# Altium PCB OTTO.PcbDoc (part 2 of 2)
Units mil, origin at the board's own origin, x right, y up, seen from the top; angles counter-clockwise.
Board outline 6000 x 4000 mil, 4 copper layers (Top Layer, Signal Layer 1, Signal Layer 2, Bottom Layer), stack 30.634 mil thick; 140 components, 89 nets, 485 pads, 197 vias.
Unrouted connection lines stored in the file: 9.
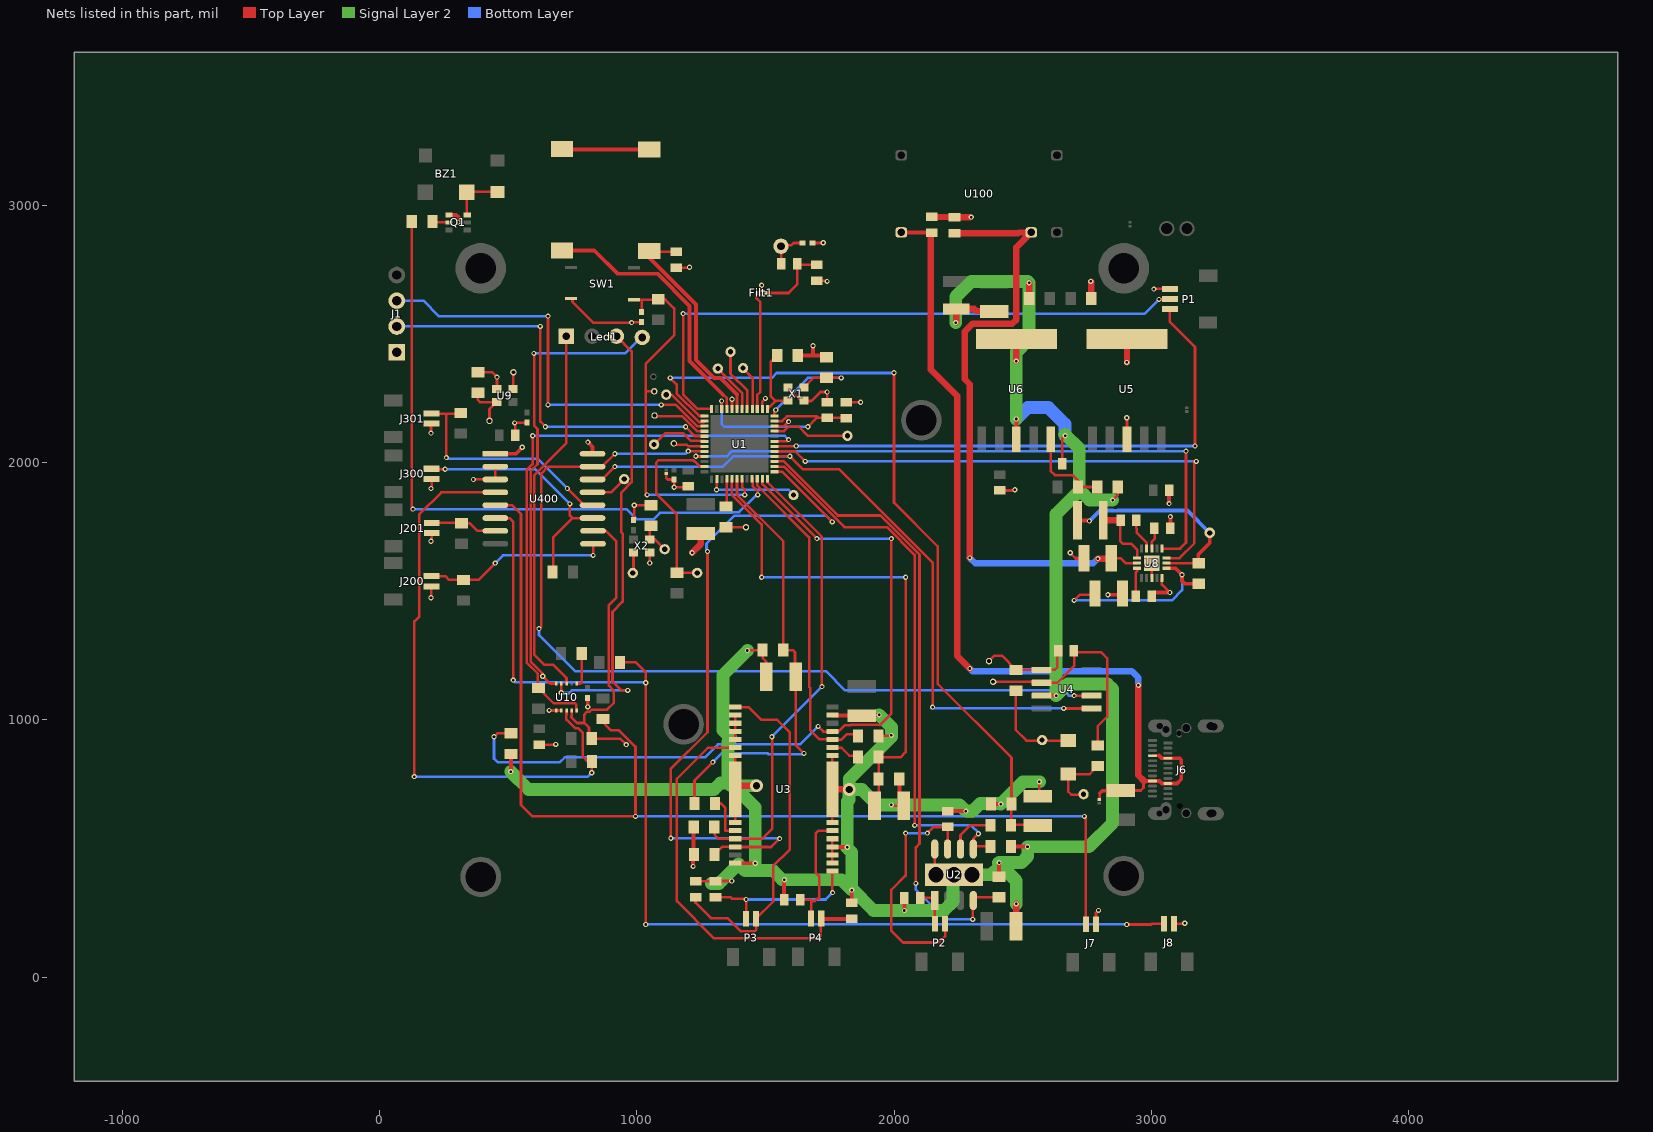
[diagram p4: the nets of this part, all layers, seen from the top]

## Via types
v1: diameter 20, hole 10, Top Layer to Bottom Layer, 190 vias
v2: diameter 40, hole 35, Top Layer to Bottom Layer, 4 vias
v3: diameter 50, hole 28, Top Layer to Bottom Layer, 2 vias
v4: diameter 40, hole 20, Top Layer to Bottom Layer, 1 vias

## Nets (pads, with @x,y where several pads share a name; then routed paths per layer and width w, separated by ;. In a path a pad name is that pad's centre, name@x,y a point inside that pad or via, vN(x,y) a via of type N, cw(c..) or ccw(c..) an arc to the next point about the centre after c; other vN are vias at no path point) (continued)
GND_1: C1.2 C2.2 C4.2 C6.2 C7.1 C14.2 C18.1 C21.1 C22.1 C27.1 C30.1 C31.2 C32.2 C33.1 C34.2 C100.1 C101.1 C104.2 C105.2 C150.2 C151.2 C152.2 C153.2 C154.2 C155.2 C400.1 D1.2 FB1.2 Filt1.2 Filt1.3 J1.1 J7.2 J8.2 J200.2 J201.2 J300.2 J301.2 P1.3 Q1.1 R11.1 R12.1 SW1.1 U1.22 U1.26 U1.32 U5.3 U5.6 U8.6 U8.8 U8.U8 U9.2 U10.6 U10.7 U400.1 U400.2 U400.3 U400.16 X1.2 X1.4 X2.2 | length 3564.4
  Top Layer w10: v1(200,1475) 201.69,1476.69 J200.2@201.69,1519.69 ; v1(200,1695) 202.92,1697.92 J201.2@202.92,1726.58 ; v1(200,1900) 202.2,1902.2 J300.2@202.2,1937.3 ; v1(200,2115) 200,2149.75 J301.2@202.07,2151.82 ; v1(365,1935) U400.3@450.08,1935.02 450,1935.1 U400.2@450.08,1985.02 ; C155.2@382.87,2351.38 383.86,2352.36 437.01,2352.36 v1(456.69,2332.68) 456.69,2289.37 U9.2@453.74,2286.42 ; C400.1@527.37,2106.99 527.37,2152.63 v1(525,2155) 575.32,2155 C154.2@575.79,2154.53 ; C33.1@620.85,903.88 683.88,903.88 v1(685,905) ; v1(659.25,1037.13) 659.61,1036.77 U10.6@686.88,1036.77 ; U10.6@686.25,1036.13 U10.6@686.89,1036.77 ; U10.7@706.88,1036.77 U10.6@686.89,1036.77 ; SW1.1@750,2640 750,2625 830,2545 v1(980,2545) 981.89,2546.89 C14.2@1018.37,2546.89 ; C152.2@987.2,1777.56 990.27,1780.63 990.27,1834.53 C153.2@1055.46,1834.53 ; v1(1050.2,1610.24) 1050.42,1610.46 X2.2@1050.42,1651.05 ; D1.2@1115.35,1958.4 1115.35,1939.65 1120,1935 C1.2@1145,1935 ; C1.2@1145,1935.31 v1(1145,1905) C2.2@1200,1905 ; C18.1@1152.86,2757.88 1202.88,2757.88 v1(1205,2760) ; R12.1@1218.98,475.87 R12.1@1221.17,478.06 ; U1.32@1370.08,2209.35 U1.32@1370.27,2209.17 1370.27,2246.86 v1(1370.08,2247.05) ; Filt1.3@1484.15,2652.47 1484.15,2689.15 v1(1485,2690) ; U1.26@1487.95,2209.17 1487.95,2237.95 v1(1500,2250) ; U1.22@1535.2,2142.24 1572.24,2142.24 v1(1590,2160) ; X1.2@1587.6,2294.29 1587.6,2286.22 1607.28,2266.53 1608.82,2266.53 1614.1,2261.26 1618.66,2261.26 1638.14,2241.78 X1.4@1650.57,2241.78 ; X1.4@1650.59,2241.14 1651.57,2240.16 1679.13,2240.16 1713.98,2275 v1(1740,2275) 1740.91,2274.09 C7.1@1740.91,2236.32 ; C104.2@1682.8,2854.35 1724.35,2854.35 v1(1725,2855) ; C105.2@1700.15,2707.31 1737.69,2707.31 v1(1740,2705) ; C151.2@1732.99,2417.01 C151.2@1740,2410 ; C6.2@1814.65,2236 1869,2236 v1(1870,2235) ; C101.1@2239.53,2955.47 C101.1@2240,2955 ; v1@2294.03,2954.03 2295,2955 v1(2300,2955) ; C22.1@2410.49,1892.2 2467.2,1892.2 v1(2470,1895) ; v1(2685,1650) 2706.43,1628.57 ; v1(2765,2705) v1@2766.5,2703.5 ; J7.2@2785.35,206.43 2785.35,250.35 v1(2795,260) ; v1(2905,2175) 2905.6,2174.4 U5.3@2905.6,2091.02 ; v1(2905,2390) v1@2905.6,2390.6 ; U8.U8@2992.99,1603.57 2992.99,1607.99 U8.U8@2995,1610 ; U8.U8@3001.97,1604.33 3002.09,1604.21 U8.6@3002.09,1552.31 ; v1(3010,2675) 3010.67,2675.67 P1.3@3072.7,2675.67 ; U8.8@3042.32,1550.2 3041.34,1549.21 3041.34,1526.73 v1(3072.5,1495.57) ; J8.2@3088.56,208.13 3128.13,208.13 v1(3130,210)
  Top Layer w15: Q1.1@270.46,2963.67 298.4,2963.67 306.56,2955.51 v1(306.56,2934.51) ; U400.1@450.08,2035.02 530.02,2035.02 v1(555,2060) ; v1(809.25,1051.13) C34.2@809.25,1084.76 ; v1(810,2080) 828.03,2061.97 U400.16@828.03,2035.02 ; v1(1218.98,430.97) R12.1@1218.98,475.87 ; R12.1@1221.17,478.06 R11.1@1221.17,583.31 ; C150.2@1625.63,2417.01 1685,2417.01 ; v1(1685,2455) 1685,2417.01 ; C151.2@1732.99,2417.01 1685,2417.01 ; 2706.43,1628.57 C30.1@2738.35,1628.57 ; v1(2831.5,1486.57) C27.1@2882.65,1486.57 ; C32.2@3002.13,1480.58 3017.12,1495.57 v1(3072.5,1495.57) ; v1(3069.16,1840.91) C21.1@3069.16,1893.6 ; C31.2@3074.5,1744.92 v1(3074.5,1790.57)
  Top Layer w25: v1(1215,1650) 1249.37,1684.37 C4.2@1249.37,1725.14 ; C100.1@2146.27,2955.47 C101.1@2239.53,2955.47 ; C101.1@2235.07,2954.03 v1@2294.03,2954.03 ; FB1.2@2766.5,2637.92 v1@2766.5,2703.5 ; v1@2905.6,2390.6 U5.6@2905.6,2480.79
  Bottom Layer w10: v1(3130,210) v1@3135,210
  other v1: 3002.5,1603.57 990.16,1834.65
GND_2: C3.1 C5.1 C8.2 C9.2 C10.1 C11.2 C12.1 C13.2 C15.1 C16.2 C17.1 C20.2 C23.1 C24.1 FB2.2 R1.2 R4.2 R5.1 R6.2 R9.2 R10.2 R14.2 R21.2 U2.8 U2.9 U3.2 U3.3 U3.4 U3.5 U3.7 U3.8 U3.13 U3.16 U3.17 U3.18 U3.19 U3.21 U3.22 U3.27 U3.Tab1 U3.Tab2 U4.3 U6.3 U6.6 | length 12001.7
  Top Layer w10: R10.2@509.94,867.48 R10.2@510.6,868.13 ; v1(510.25,799.13) v1@510.6,799.48 ; C13.2@1228.56,373.39 C10.1@1298.39,373.39 ; C10.1@1308.07,372.05 1306.73,373.39 C10.1@1298.39,373.39 ; v1(1369.09,374.02) 1299.02,374.02 C10.1@1298.39,373.39 ; U3.Tab2@1382.55,739.45 U3.21@1382.55,860.5 ; U3.22@1382.87,601.38 U3.Tab2@1382.87,731.3 1382.87,736.22 1384.33,737.67 U3.Tab2@1384.84,738.19 ; U3.19@1382.87,924.21 U3.18@1382.87,955.71 U3.17@1382.87,987.2 U3.16@1382.87,1018.7 U3.16@1383.86,1019.68 ; U3.27@1387.53,447.83 U3.27@1392.45,442.91 ; v1(1430,1270) 1431.59,1271.59 R14.2@1489.01,1271.59 ; R14.2@1490,1270 1490,1240 1503.72,1226.28 C17.1@1503.72,1167.57 ; v1@1573,378 v1(1574,379) ; U3.5@1760,538.17 1760.5,537.67 1760.5,506.17 U3.2@1760.5,443.18 ; U3.7@1760.5,600.66 1760.5,730.58 U3.8@1760.5,860.5 ; v1@1815.83,506.17 1817,505 v1(1818,505) ; v3(1826,730) v3@1826.58,730.58 ; C11.2@1872.13,1017.98 C11.2@1874,1019.85 ; R9.2@1940,938.35 1988.35,938.35 v1(1990,940) ; v1(1942,1020) 1942.7,1020 v1@1942.85,1019.85 ; v1(1990,670) 1986,666 2021,666 C12.1@2038.09,666 ; U2.8@2158.37,508.34 U2.8@2158.37,498.34 2158.37,426.63 U2.9@2160,425 ; v1(2240,2545) v1@2241.43,2546.42 ; v1@2279,646 v1(2279.5,645.5) ; v1@2413.98,674.02 v1(2415,673) ; v1(2475,2170) v1@2475.6,2169.4 ; v1(2475,2395) v1@2475.6,2395.6 ; v1@2517.65,508.35 v1(2519,507) ; v1(2525,2700) v1@2525.5,2699.5 ; C3.1@2559,704.09 2565,710.09 v1(2565,760) ; C23.1@2654.13,1995.58 2654.13,2094.13 v1(2665,2105) ; v1(2850,1855) 2869.84,1874.84 R21.2@2869.84,1905.55
  Top Layer w15: v1@510.6,799.48 R10.2@510.6,868.13 ; U3.27@1392.45,442.91 v1(1460.63,442.91) ; C15.1@1573,300.35 v1@1573,378 ; U3.4@1760.5,506.17 v1@1815.83,506.17 ; U3.13@1760.5,1017.98 C11.2@1872.13,1017.98 ; C16.2@1835.65,289 v1(1835.65,338.65) ; C11.2@1874,1019.85 v1@1942.85,1019.85 ; C12.1@2021,666 R6.2@2021,769.35 ; v1(2040.34,259.34) C5.1@2040.34,307.98 ; C8.2@2208.65,646 v1@2279,646 ; R1.2@2376.66,674.02 v1@2413.98,674.02 ; R5.1@2408.35,391 v1(2408.35,445.35) ; R4.2@2455,508.35 v1@2517.65,508.35 ; U6.3@2475.6,2091.02 v1@2475.6,2169.4 ; U4.3@2573.45,1094.74 v1(2630.36,1094.74)
  Top Layer w25: U3.Tab2@1382.55,739.45 U3.Tab2@1384.33,737.67 ; U3.Tab2@1383.86,744.09 v3(1465.55,744.09) ; U3.Tab1@1760.5,730.58 1826,730.58 v3@1826.58,730.58 ; v1@2241.43,2546.42 C24.1@2241.43,2598.35 2311.65,2598.35 2320,2590 C20.2@2395,2590 ; C9.2@2474.43,198.63 2475,199.2 v1(2475,285) ; v1@2475.6,2395.6 U6.6@2475.6,2480.79 ; FB2.2@2525.5,2638.23 v1@2525.5,2699.5
  Signal Layer 2 w10: 1290,365 1299.02,374.02 1329.02,374.02 v1(1369.09,374.02) ; 1335,985 1337,987 ; 1395,440 1397.91,442.91 v1(1460.63,442.91) ; v1@1565,380 v1@1570,380 ; v3@1825,730 v3(1826,730) ; v1@1835,345 v1@1835.65,344.35 ; U2.9@2230,395 U2.9@2235,400 ; v1(2279.5,645.5) v1@2280,645 ; v1@2470,2395 v1@2475,2390 ; v1@2520,2705 v1(2525,2700) ; 2715,1900 2720,1895
  Signal Layer 2 w50: v1(510.25,799.13) 579.39,730 1300,730 1325,755 1355.32,755 ; 1290,365 1320,365 1329.02,374.02 1395,440 1420,415 1530,415 v1@1565,380 ; v1(1430,1270) 1335,1175 1335,985 1335,960 1367,928 1355.32,916.32 1355.32,755 ; v1(1460.63,442.91) 1460.63,659.37 1375.91,744.09 ; v3(1465.55,744.09) 1375.91,744.09 ; v1(1574,379) 1796,379 v1@1835,340 ; v1@1815,505 1835.65,484.35 1835.65,344.35 1920.66,259.34 v1(2040.34,259.34) 2194.34,259.34 2230,295 U2.9@2230,395 ; v1(1818,505) 1818,683 1825,690 v3@1825,730 ; v1(1942,1020) 1990,972 v1(1990,940) ; v1@1990,935 1826,771 v3(1826,730) 1875,730 1935,670 v1(1990,670) 2255,670 v1(2279.5,645.5) 2305.5,645.5 2335,675 v1@2415,675 ; v1(2240,2545) 2240,2645 2300,2705 v1@2520,2705 ; U2.9@2303.37,398.34 2378.34,398.34 2410,430 ; v1@2405,445 2475,375 v1(2475,285) ; v1(2408.35,445.35) 2495.35,445.35 2520,470 v1@2520,505 ; v1(2415,673) 2502,760 v1(2565,760) ; v1(2475,2170) v1@2475,2390 ; v1(2475,2395) 2475,2430 2525,2480 v1(2525,2700) ; v1(2519,507) 2757,507 2850,600 2850,1120 2830,1140 2675.62,1140 v1(2630.36,1094.74) 2630.36,1800.36 2720,1890 2720,1895 ; v1@2665,2110 2720,2055 2720,1895 ; v1(2850,1855) 2760,1855 2720,1895 ; 1355.32,755 1366.22,744.09 1375.91,744.09 ; 1355.32,755 1365,755 1375.91,744.09
  Bottom Layer w50: v1(2475,2170) 2520,2215 2600,2215 2665,2150 v1(2665,2105)
NetANT1_1: ANT1.1 C104.1 L3.1 | length 169.5
  Top Layer w10: ANT1.1@1560,2855 1561.72,2853.28 ANT1.1@1561.72,2848.28 ; L3.1@1561.72,2773.16 ANT1.1@1561.72,2848.28 ; C104.1@1643.43,2854.35 1609.35,2854.35 1600,2845 1565,2845 ANT1.1@1561.72,2848.28
NetBZ1_1: BZ1.1 D4.2 Q1.6 | length 220.1
  Top Layer w10: BZ1.1@340,3050 343.08,3053.08 D4.2@459.14,3053.08 ; Q1.6@341.33,2963.67 339.61,2965.39 BZ1.1@339.61,3052.28 BZ1.1@346.92,3059.59
NetC3_2: C3.2 R1.1 R2.2 U1.37 | length 3126
  Top Layer w10: v1(1130,2330) 1155,2305 1155,2270 1155.2,2270 1243.59,2181.61 U1.37@1263.54,2181.61 ; v1(2000,2350) 2000,1845 2170,1675 2170,1140 2456.66,853.34 R1.1@2456.66,674.02 2455,672.36 R2.2@2455,591 2456,592 C3.2@2539.35,592
  Bottom Layer w10: v1(1130,2330) 1525,2330 1544,2349 v1@1999,2349
NetC5_2: C5.2 P2.1 U2.1 | length 156.3
  Top Layer w10: C5.2@2102.34,307.98 2102.7,308.34 2158.37,308.34 2158.66,308.05 P2.1@2158.66,208.37
NetC6_1: C6.1 C7.2 U1.23 U1.34 | length 834.5
  Top Layer w10: U1.34@1330,2220 v1(1330,2240) ; U1.23@1535.2,2161.92 1565.05,2161.92 1583.13,2180 1700,2180 1705,2175 C7.2@1745,2175 ; v1(1665,2140) 1699.32,2174.32 1810.68,2174.32 C6.1@1815,2170
  Bottom Layer w10: v1(1330,2240) 1330,2150 1340,2140 v1(1665,2140)
NetC8_1: C8.1 P2.2 U2.7 | length 952.7
  Top Layer w10: v1(2045,560) 2045,395 1990,340 1990,180 2035,135 2175,135 2200,160 P2.2@2200,220 ; v1(2130,560) 2154,584 C8.1@2208.65,584 ; U2.7@2208.37,508.34 2208.37,583.37 C8.1@2210,585
  Bottom Layer w10: v1(2045,560) v1(2130,560)
NetC10_2: C10.2 P3.1 U3.1 | length 626.3
  Top Layer w10: C10.2@1308.07,312.99 1310.04,311.02 1364.61,311.02 1370.98,304.66 1422.34,304.66 v1(1425,302) 1425,227.71 P3.1@1424.66,227.37 ; U3.1@1760.5,411.68 1760.5,329.5 v1(1761,329)
  Bottom Layer w10: v1(1425,302) 1734,302 v1(1761,329)
NetC12_2: C12.2 R6.1 R8.2 U1.5 | length 1973.3
  Top Layer w10: U1.5@1369.84,1937.51 1369.84,1875.16 1485,1760 v1(1485,1555) ; C12.2@1941,665.65 1941,769.35 R6.1@1940,770.35 1940,855 2025,855 2045,875 v1(2045,1555)
  Bottom Layer w10: v1(1485,1555) v1(2045,1555)
NetC13_1: C13.1 P3.2 U3.15 | length 1379.4
  Top Layer w10: C13.1@1228.35,311.02 1228.35,290.31 1288.65,230 1353,230 1405,178 1458,178 1464.03,184.03 P3.2@1464.03,227.37 1530,293.34 1530,431.64 1595,496.64 1595,951.26 1546.13,1000.13 1484.12,1000.13 1434.06,1050.2 1384.84,1050.2 U3.15@1383.86,1051.18
NetC14_1: "Jump 2.1" C14.1 R7.1 SW1.2 U1.7 | length 1472.6
  Top Layer w10: SW1.2@990,2635 990,2633.66 R7.1@1083.66,2633.66 ; C14.1@1018.37,2586.26 1020,2587.89 1020,2630 ; v1(1040,1875) 1035,1880 1035,2275 ; 1068.01,2277.57 1037.57,2277.57 1035,2275 ; R7.1@1080,2635 1110,2635 1145,2600 1145,2495 1035,2385 1035,2275 ; U1.7@1409.21,1937.51 1409.21,1905.79 1420,1895 v1(1420,1875)
  Bottom Layer w10: v1(1040,1875) v1(1420,1875)
NetC15_2: C15.2 P4.1 U3.6 | length 480.3
  Top Layer w10: C15.2@1635,300.35 1676.32,300.35 1677.66,299 ; P4.1@1677.66,228.37 1677.66,299 ; U3.6@1760.5,569.17 1705.17,569.17 1695,559 1695,407.43 1710,392.43 1710,306.03 1708.42,304.45 1700.21,304.45 1692.01,296.25 1680.42,296.25 1677.66,299
NetC16_1: C16.1 P4.2 U3.20 | length 1564.5
  Top Layer w10: U3.20@1384.84,892 1276,892 1155.51,771.51 1155.51,295.49 1299,152 1706,152 1716,162 1716,227.34 P4.2@1716.34,227
  Top Layer w15: P4.2@1716.34,227 C16.1@1835.65,227
NetC17_2: C17.2 R13.2 R14.1 U1.6 | length 1764.3
  Top Layer w10: R13.2@1224.41,675.2 1224.41,764.41 v1(1296,836) ; U1.6@1389.53,1939.53 U1.6@1389.53,1937.51 1389.53,1875.27 1570,1694.8 R14.1@1570,1271.59 ; R14.1@1569.01,1271.59 R14.1@1570,1271.59 ; R14.1@1570,1270 R14.1@1570,1271.59 ; C17.2@1617.9,1167.57 C17.2@1617.9,1167.1 ; v1(1650,870) 1617.9,902.1 C17.2@1617.9,1167.1 ; R14.1@1570,1271.59 1606.59,1271.59 1615,1263.18 1615,1170 C17.2@1617.9,1167.1
  Bottom Layer w10: v1@1295,835 v1(1296,836) 1330,870 1508.33,870 1511.33,867 1647,867 v1(1650,870)
NetC18_2: C18.2 L2.1 U1.31 | length 920.1
  Top Layer w10: L2.1@1020,2825 L2.1@1040,2825 ; L2.1@1040,2820 1040.12,2819.88 C18.2@1152.86,2819.88 ; L2.1@1045,2825 L2.1@1047.55,2822.45 ; U1.31@1389.53,2209.17 1389.53,2265.47
  Top Layer w15: L2.1@1020,2825 1230,2615 1230,2400 1300,2330 1325,2330 1389.53,2265.47
NetC19_1: C19.1 R16.1 Term5.1 U4.1 | length 367.8
  Top Layer w10: Term5.1@2369.33,1228.74 2390.59,1250 2420,1250 R16.1@2475,1195 ; R16.1@2473.99,1194.11 2474.62,1194.74 U4.1@2573.45,1194.74 2624.74,1194.74 2635,1205 C19.1@2635,1270
NetC19_2: C19.2 R15.1 Term4.1 U4.2 | length 894.2
  Top Layer w10: Term4.1@2385.33,1148.74 2569.45,1148.74 U4.2@2573.45,1144.74 2634.74,1144.74 2700,1210 C19.2@2700,1265 ; C19.2@2700,1270 2705.88,1264.12 2804.62,1264.12 2828.99,1239.75 2828.99,1013.11 2791.97,976.09 R15.1@2791.97,900.77
NetC27_2: C27.2 R20.1 U8.9 | length 745.3
  Top Layer w10: v1(2700,1465) 2721.57,1486.57 C27.2@2776.35,1486.57
  Top Layer w15: U8.9@3060.02,1589.68 3094.39,1589.68 v1(3119.5,1564.57) 3119.5,1540.57 3130.5,1529.57 R20.1@3184.5,1529.57
  Bottom Layer w10: v1(2700,1465) 3080,1465 3120,1505 v1@3120,1565
NetC29_1: C29.1 U8.15 | length 123.4
  Top Layer w10: 2942.5,1746.57 C29.1@2942.5,1776.23 ; 2942.91,1744.09 2942.91,1729.03 2982.4,1689.54 U8.15@2982.4,1666.67
NetC29_2: C29.2 L4.1 U8.1 | length 260.8
  Top Layer w10: L4.1@2813.5,1775.57 L4.1@2814.15,1776.23 ; C29.2@2880,1775.73 2880,1694.07 2888.5,1685.57 2921.5,1685.57 2945.65,1661.42 2945.65,1631.12 U8.1@2946.85,1629.92
  Top Layer w25: L4.1@2814.15,1776.23 C29.2@2880.5,1776.23
  Top Layer w35: C29.2@2880,1775.73 C29.2@2880.5,1776.23
NetC30_2: C30.2 C101.2 U8.2 U100.9 | length 2441.3
  Top Layer w10: 2482.03,2892.03 2485,2895 ; U100.9@2532.87,2895 U100.9@2533.39,2895.53 ; C30.2@2843.65,1627.57 C30.2@2844.65,1628.57 ; C30.2@2846.46,1627.95 2881.89,1627.95 2900.35,1609.49 U8.2@2944.91,1609.49
  Top Layer w25: C101.2@2235.07,2892.03 2482.03,2892.03 ; v1(2295,1630) 2295,2305 2275,2325 2275,2510 2305,2540 2460,2540 2475,2555 2475,2837.13 U100.9@2532.87,2895 ; 2485,2895 U100.9@2532.87,2895 ; U100.9@2535,2895 U100.9@2532.87,2895 ; v1(2792.5,1627.57) C30.2@2843.65,1627.57
  Bottom Layer w25: v1(2295,1630) 2315.43,1609.57 2774.57,1609.57 v1@2790,1625
NetC31_1: C31.1 U8.14 | length 82.1
  Top Layer w10: U8.14@3002.09,1666.67 3002.09,1693.03 3012.8,1703.74 C31.1@3012.8,1744.09 ; C31.1@3012.5,1744.92 C31.1@3012.68,1744.74
NetC32_1: C32.1 U8.3 | length 111.4
  Top Layer w10: C32.1@2940.13,1480.58 2940.13,1573.98 2944.88,1578.74 U8.3@2944.88,1588.58 ; U8.3@2942.91,1589.57 U8.3@2943.9,1588.58
NetC100_2: C100.2 C102.1 D100.2 J6.A4 J6.A9 J6.B4 J6.B9 U100.14 | length 3525.3
  Top Layer w10: U100.14@2028.39,2895.53 U100.14@2028.92,2895 ; C100.2@2142.64,2889.85 C100.2@2146.27,2893.47 ; D100.2@2798.43,690.39 2800,691.97 2800,715 ; C102.1@2881.81,725.79 2959.21,725.79 2970,736.57 2970,760 ; J6.A9@3005.15,861.33 3030.67,861.33
  Top Layer w15: U100.14@2028.92,2895 C100.2@2145,2895 ; 2800,715 2810,725 C102.1@2875,725 ; 2972.1,762.9 J6.A4@3005.15,762.9 3032.1,762.9 3041.94,753.06 J6.B9@3064.4,753.06 3100.06,753.06 3116.5,769.5 3116.5,845.47 3110.49,851.49 J6.B4@3064.4,851.49 3040.51,851.49 3030.67,861.33
  Top Layer w25: C100.2@2142.64,2889.85 2142.64,2362.36 2245,2260 2245,1250 v1(2295,1200) ; v1(2950,1135) 2950,785 2972.1,762.9
  Bottom Layer w25: v1(2295,1200) 2305,1190 2925,1190 2950,1165 v1(2950,1135)
NetC105_1: C105.1 Filt1.4 L3.2 | length 294.7
  Top Layer w10: Filt1.4@1505,2660 1590,2660 1623.72,2693.72 L3.2@1623.72,2773.16 1626.88,2770 C105.1@1705,2770
NetC150_1: C150.1 U1.25 X1.3 | length 286.1
  Top Layer w10: U1.25@1510,2210 1540,2240 ; C150.1@1545.63,2417.01 1520,2391.38 1520,2260 1540,2240 ; X1.3@1587.34,2240.98 1540.98,2240.98 1540,2240
NetC151_1: C151.1 U1.24 X1.1 | length 491.1
  Top Layer w10: U1.24@1535.2,2181.92 1535.2,2200.2 v1(1540,2205) ; X1.1@1650.59,2293.31 1687.91,2330.63 C151.1@1737.99,2330.63 ; C151.1@1739.02,2330.98 1740,2330 v1(1795,2330)
  Bottom Layer w10: v1(1540,2205) 1665,2330 v1(1795,2330)
NetC153_1: "Jump 1x.1" C153.1 X2.3 | length 127.2
  Top Layer w10: X2.3@1050.42,1702.12 1050.42,1748.26 C153.1@1056.1,1753.94 ; X2.3@1051.18,1701.77 1070.49,1701.77 1108.5,1663.76
NetC155_1: "Term 8.1" C155.1 U9.3 | length 188.5
  Top Layer w10: C155.1@381.89,2270.67 381.89,2244.09 390.12,2235.86 U9.3@455.35,2235.86 ; 427.55,2162.95 427.55,2208.06 U9.3@455.35,2235.86 ; U9.3@455.47,2235.86 U9.3@455.35,2235.86 ; U9.3@455.71,2236.22 U9.3@455.35,2235.86
NetFilt1_1: Filt1.1 U1.27 | length 461.9
  Top Layer w10: Filt1.1@1465,2660 1465,2640 1480,2625 1480,2275 1468.27,2263.27 U1.27@1468.27,2209.17
NetJ1_3: J1.3 U1.39 | length 1602.7
  Top Layer w10: v1(655,2225) v1(655,2570) ; v1(1095,2225) 1151.67,2225 1234.43,2142.24 U1.39@1263.54,2142.24
  Bottom Layer w10: J1.3@65,2630 170,2630 230,2570 v1(655,2570) ; v1(655,2225) v1(1095,2225)
NetJ7_1: J7.1 R30.1 U400.5 | length 4334.7
  Top Layer w10: U400.5@450.08,1835.02 514.98,1835.02 550,1800 550,670 595,625 v1(995,625) 995,895.26 930.26,960 900,960 855.24,1004.76 R30.1@855.24,1005.76 ; v1(2740,625) 2745,625 2745.98,624.02 J7.1@2745.98,206.43
  Bottom Layer w10: v1(995,625) 1840,625 1841.5,626.5 2738.5,626.5 v1(2740,625)
NetJ8_1: J8.1 R29.1 U400.6 | length 4323.2
  Top Layer w10: U400.6@450.08,1785.02 504.98,1785.02 520,1770 v1(520,1155) ; R29.1@935,1225 995,1225 1035,1185 v1(1035,1145) v1(1035,205) ; v1(2905,205) 3000,205 3003.13,208.13 J8.1@3049.19,208.13
  Bottom Layer w10: v1(520,1155) 528.87,1146.13 1033.87,1146.13 v1(1035,1145) ; v1(1035,205) 1036,206 2904,206 v1(2905,205)
NetJ200_1: J200.1 R200.1 U400.9 | length 718.9
  Top Layer w10: J200.1@201.69,1559.06 255.94,1559.06 270,1545 385,1545 v1(450,1610) v1(450,1610) ; U400.9@830.08,1685.02 v1(830,1640) 830.16,1640 v1(830,1640)
  Bottom Layer w10: v1(450,1610) 480,1640 v1(830,1640)
NetJ201_1: J201.1 R201.1 U400.7 | length 260
  Top Layer w10: J201.1@202.92,1765.95 319.05,1765.95 320,1765 350,1765 379.98,1735.02 U400.7@450.08,1735.02
NetJ300_1: J300.1 R300.1 U400.11 | length 976.2
  Top Layer w10: J300.1@200,1980 205,1975 v1(255,1975) ; R300.1@675,1575 675,1710 750,1785 740,1795 v1(740,1840) ; 750.02,1785.02 U400.11@828.03,1785.02
  Bottom Layer w10: v1(255,1975) 605,1975 v1(740,1840)
NetJ301_1: J301.1 R301.1 U400.12 | length 929.3
  Top Layer w10: J301.1@202.07,2191.19 260,2191.19 ; v1(260,2020) 260,2191.19 ; R301.1@315,2190 313.81,2191.19 260,2191.19 ; v1(730,1900) 794.98,1835.02 U400.12@828.03,1835.02
  Bottom Layer w10: v1(260,2020) 264,2016 614,2016 v1(730,1900)
"NetJump 1_1": "Jump 1.1" U1.43 | length 123.3
  Top Layer w10: 1145,2075 1150,2070 1195,2070 1201,2064 1263.04,2064 U1.43@1263.54,2063.5
"NetJump 2x_1": "Jump 2x.1" X2.1 | length 79.6
  Top Layer w10: 986.22,1571.85 987.24,1572.87 X2.1@987.24,1651.05
"NetJump 3_1": "Jump 3.1" U1.2 | length 350.3
  Top Layer w10: v1(1310,1895) 1311.21,1896.21 U1.2@1311.21,1936.51
  Bottom Layer w10: v1(1310,1895) 1590,1895 1610,1875
"NetJump 3x_1": "Jump 3x.1" U9.1 | length 64.9
  Top Layer w10: U9.1@518.7,2287.4 520.39,2289.09 520.39,2351.63
"NetJump 5_1": "Jump 5.1" R3.1 | length 77.8
  Top Layer w10: R3.1@1347.37,1749.66 1424.66,1749.66 1425,1750
"NetJump 100_1": "Jump 100.1" U1.42 | length 228.8
  Top Layer w10: 1067.46,2071.29 1110,2113.83 1110,2115 1180,2115 1210,2085 U1.42@1265,2085
"NetJump 101_1": "Jump 101.1" U1.38 | length 194.6
  Top Layer w10: 1115,2265 1135,2265 1242.18,2157.82 1259.44,2157.82 U1.38@1263.54,2161.92
"NetJump 103_1": "Jump 103.1" U1.40 | length 219.4
  Top Layer w10: 1070,2185 1075,2180 1176.87,2180 1234.32,2122.55 U1.40@1263.54,2122.55
"NetJump 104_1": "Jump 104.1" U1.30 | length 202
  Top Layer w10: 1310,2370 1409.27,2270.73 U1.30@1409.27,2209.17
"NetJump 105_1": "Jump 105.1" U1.29 | length 248.4
  Top Layer w10: 1364.46,2431.26 1364.46,2345.54 1430,2280 U1.29@1430,2210
"NetJump 106_1": "Jump 106.1" U1.28 | length 173.2
  Top Layer w10: 1413.24,2367.97 1413.24,2366.76 1450,2330 U1.28@1450,2210
"NetJump 109_1": "Jump 109.1" U1.21 | length 305.5
  Top Layer w10: U1.21@1535.2,2122.92 1572.92,2122.92 1590,2140 1630,2140 1665.2,2104.8 1819.03,2104.8
NetL1_1: L1.1 L2.2 | length 339.1
  Top Layer w10: L1.1@710,3220 L1.1@711.72,3218.28
  Top Layer w15: L1.1@711.72,3218.28 L2.2@1048.37,3218.28
NetL1_2: L1.2 U1.33 | length 1046.8
  Top Layer w10: 1336,2264 1337.87,2264 1350.39,2251.48 1350.39,2209.4 U1.33@1350.16,2209.17
  Top Layer w15: L1.2@709.56,2825.15 834.85,2825.15 925,2735 1080,2735 1205,2610 1205,2395 1336,2264
NetL4_2: L4.2 R20.2 U8.10 | length 830.6
  Top Layer w10: v1@2757.5,1775.57 v1(2759.5,1773.57) ; U8.10@3060.02,1609.36 3184.28,1609.36 R20.2@3182.5,1611.15
  Top Layer w15: L4.2@2713.5,1775.57 v1@2757.5,1775.57 ; R20.2@3182.5,1611.15 3182.5,1643.57 3227.5,1688.57 v4(3227.5,1727.57)
  Bottom Layer w15: v1(2759.5,1773.57) 2800.5,1814.57 2850.02,1814.57 2851.09,1813.5 2868.91,1813.5 2869.98,1814.57 3140.5,1814.57 v4(3227.5,1727.57)
NetLed1_1: Led1.1 U10.3 | length 1474.8
  Top Layer w10: Led1.1@726.14,2492.13 726.14,2075.94 601,1950.8 601,1254 640,1215 675,1215 726.88,1163.12 U10.3@726.88,1141.77
NetLed1_3: Led1.3 U10.4 | length 1776.9
  Top Layer w10: v1@706.25,1105.13 v1(706.25,1106.13) 706.88,1106.76 U10.4@706.88,1141.77 ; Led1.3@921.14,2492.13 980.2,2433.07 980.2,1924.28 940,1884.08 940,1729.67 945,1724.67 945,1460 905.62,1420.62 905.62,1149.38 940,1115 v1(965,1115)
  Bottom Layer w10: v1@705,1105 737.32,1105 747.32,1115 v1(965,1115)
NetLed1_4: Led1.4 U10.5 | length 1802.7
  Top Layer w10: v1(600,2425) 601.83,2423.17 601.83,2143.17 614,2131 614,1994.2 587,1967.2 587,1227.8 634.25,1180.55 v1(634.25,1170.13) 662.61,1141.77 U10.5@686.88,1141.77
  Bottom Layer w10: v1(600,2425) 955,2425 Led1.4@1020,2490
NetP1_1: P1.1 U1.18 | length 2207.1
  Top Layer w10: U1.18@1535.2,2063.5 1608.5,2063.5 v1(1620,2065) ; P1.1@3072.7,2596.93 3072.7,2547.3 3170,2450 v1(3170,2065)
  Bottom Layer w10: v1(1620,2065) v1(3170,2065)
NetP1_2: P1.2 U1.36 | length 2365.3
  Top Layer w10: v1(1180,2580) 1180,2265 1235.83,2209.17 U1.36@1291.1,2209.17 ; v1(3030,2635) 3071.4,2635 P1.2@3072.7,2636.3
  Bottom Layer w10: v1(1180,2580) 2975,2580 v1(3030,2635)
NetQ1_2: Q1.2 R23.1 | length 66.2
  Top Layer w10: R23.1@205.56,2937.17 208.58,2934.14 243.62,2934.14 243.73,2934.25 270.35,2934.25 Q1.2@270.46,2934.14
NetR2_1: R2.1 U2.6 | length 176.7
  Top Layer w10: U2.6@2258.37,508.34 2258.37,552.37 2297,591 R2.1@2375,591
NetR3_2: R3.2 U1.4 | length 106.4
  Top Layer w10: R3.2@1347.37,1829.66 1350,1832.29 U1.4@1350,1935
NetR4_1: R4.1 U1.14 U2.5 | length 2126.2
  Top Layer w10: U1.14@1535.2,1984.76 1534.95,1985 1571.87,1985 1806.87,1750 1971.87,1750 2080,1641.87 v1(2080,590) ; v1(2328,558) 2308.37,538.37 2308.37,508.34 R4.1@2375,508.35
  Bottom Layer w10: v1(2080,590) 2300,590 v1@2330,560
NetR5_2: R5.2 U1.15 U2.4 | length 2476.9
  Top Layer w10: U1.15@1535.2,2004.44 1535.2,2005 1571.67,2005 1781.67,1795 1946.67,1795 2099,1642.67 2099,519 2085,505 v1(2085,365) ; v1(2306,225) 2306,305.97 2311.03,311 R5.2@2408.35,311
  Bottom Layer w10: v1(2085,365) 2085,340 2200,225 v1(2306,225)
NetR8_1: R8.1 U3.9 | length 113.3
  Top Layer w10: U3.9@1760.5,892 1796,892 1827,861 1857.65,861 R8.1@1860,863.35
NetR9_1: R9.1 U1.10 U3.10 | length 1267.2
  Top Layer w10: U1.10@1468.27,1937.51 1468.27,1911.73 1670,1710 1670,1128.5 1675,1123.5 1675,960 1710,925 U3.10@1755,925 ; U3.10@1760.5,923.5 1795.5,923.5 1817.35,945.35 R9.1@1861,945.35
NetR10_1: R10.1 U1.11 U3.11 | length 3088.8
  Top Layer w10: v1(445,935) 458.13,948.13 R10.1@510.6,948.13 ; U1.11@1487.95,1937.51 1487.95,1917.05 v1(1700,1705) ; v1(1705,975) 1725,955 1750,955 U3.11@1750,950 ; U3.11@1760.5,954.99 1783.69,954.99 1808.69,980 1831,980 1832,981 1946,981 ; 1945,980 1946,981 ; v1(1990,1705) 1990,1025 1946,981
  Bottom Layer w10: v1(445,935) 445,850 460,835 700,835 720,855 1265,855 1315,905 1635,905 v1(1705,975) ; v1(1700,1705) v1(1990,1705)
NetR11_2: R11.2 U1.12 U3.24 | length 1808.3
  Top Layer w10: R11.2@1302.17,586.61 1303.15,585.63 1303.15,553.15 1317.91,538.39 U3.24@1382.87,538.39 ; U3.24@1383.33,537.67 1486.67,537.67 1526,577 1526,934 v1(1525,935) ; U1.12@1507.64,1937.51 1507.64,1924.23 1719,1712.87 1719,1136 1720,1135 v1(1720,1130)
  Bottom Layer w10: v1(1525,935) v1(1720,1130)
NetR12_2: R12.2 U1.13 U3.25 | length 2759.2
  Top Layer w10: v1(1132.87,540.35) 1131.89,541.34 1131.89,809.15 1275,952.26 v1(1275,1655) ; R12.2@1302.17,477.36 1331.69,506.89 U3.25@1382.87,506.89 ; U3.25@1381.89,507.87 1383.59,506.17 1512.83,506.17 1513,506 1522,506 v1(1555,539) ; U1.13@1535.2,1965.07 1564.93,1965.07 v1(1760,1770)
  Bottom Layer w10: v1(1132.87,540.35) 1554.65,540.35 v1@1555,540 ; v1(1275,1655) 1270.9,1659.1 1270.9,1685.9 1379.1,1794.1 1735.9,1794.1 v1(1760,1770)
NetR13_1: R13.1 U3.23 | length 173.7
  Top Layer w10: R13.1@1304.13,675.2 1326.77,675.2 1344.49,657.48 1344.49,569.88 U3.23@1382.87,569.88
NetR15_2: R15.2 R17.1 Term2.1 | length 262
  Top Layer w10: Term2.1@2738.99,710.11 2688.99,710.11 2677.33,721.77 R17.1@2677.33,789.74 2760.94,789.74 R15.2@2791.97,820.77
NetR16_2: R16.2 R17.2 Term3.1 | length 374.4
  Top Layer w10: R16.2@2473.99,1114.11 2472.99,1113.11 2472.99,962.01 2515,920 2575,920 2575.26,919.74 R17.2@2677.33,919.74
NetR19_1: R19.1 R21.1 U6.5 | length 348
  Top Layer w10: U6.5@2610,2095 2610,1966.54 2624.97,1951.57 2693.82,1951.57 2715.16,1930.24 R19.1@2715.16,1905.6 2789.79,1905.6 R21.1@2789.84,1905.55
NetR22_2: R22.2 Term8.1 U1.47 | length 745.6
  Top Layer w10: R22.2@1155,1570 1156.82,1571.82 Term8.1@1234.87,1571.82 ; R22.2@1155.68,1572.91 1155.68,1799.32 1075,1880 1075,2000 1085,2010 1218.13,2010 1222.13,2006 1224,2006 1245,1985 U1.47@1265,1985
NetR23_2: R23.2 U1.9 | length 2597.1
  Top Layer w10: R23.2@125.56,2937.17 125.56,1815.56 v1(130,1820) ; U1.9@1450,1940 1450,1910 1470,1890 v1(1470,1875)
  Bottom Layer w10: v1(130,1820) 960.51,1820 1000.51,1780 1065,1780 1090,1805 1370.2,1805 1373.3,1808.1 1398.1,1808.1 1465,1875 v1(1470,1875)
NetR24_1: R24.1 U10.9 U400.10 | length 1231.7
  Top Layer w10: U10.9@746.88,1036.77 746.96,1036.69 746.96,1014.56 746.25,1013.85 746.25,1010.13 768.25,988.13 796.25,988.13 814.25,970.13 814.25,914.79 R24.1@815.28,913.76 ; 795,990 795,1020 807.13,1032.13 817.12,1032.13 824.99,1040 885,1040 910,1065 910,1115 891.62,1133.38 891.62,1446.62 920,1475 920,1695 U400.10@880,1735 ; R24.1@825.25,927.79 935.6,927.79 v1(959.25,904.13) ; U400.10@830.08,1735.02 U400.10@880.02,1735.02
NetR25_1: R25.1 U10.8 U400.4 | length 2349.9
  Top Layer w10: v1(135,780) 135,1383.13 155,1403.13 155,1800 240,1885 U400.4@450.08,1885.02 ; U10.8@726.88,1036.77 726.88,1022.76 726.25,1022.13 726.25,1001.85 759.97,968.13 771.12,968.13 790.25,949 790.25,858.13 809.26,839.13 R25.1@825.62,839.13 ; v1(825,795) R25.1@825,835
  Bottom Layer w10: v1(135,780) 810,780 v1(825,795)
NetR26_1: R26.1 U1.19 U10.10 | length 2264.7
  Top Layer w10: v1(595,2105) 595,1995 573,1973 573,1222 615,1180 R26.1@615,1125 ; R26.1@617.6,1124.13 676.73,1065 760,1065 765,1060 U10.10@765,1035 ; U1.19@1535.2,2083.18 1583.18,2083.18 v1(1590,2090)
  Bottom Layer w10: v1(595,2105) 595.5,2105.5 1157.01,2105.5 1157.51,2105 1575,2105 v1(1590,2090)
NetR28_1: R28.1 U10.1 | length 133.9
  Top Layer w10: U10.1@766.88,1141.77 767.52,1141.13 780.25,1141.13 785.62,1146.5 R28.1@785.62,1259.13
NetTerm200_1: Term200.1 U400.13 | length 142.7
  Top Layer w10: U400.13@828.03,1885.02 900.02,1885.02 Term200.1@950,1935
NetU1_16: U1.16 U4.5 U400.14 | length 2782.1
  Top Layer w10: U400.14@828.03,1935.02 865.02,1935.02 v1(915,1985) ; U1.16@1535,2025 v1(1595,2025) 1645,1975 1786.47,1975 2150,1611.47 v1(2150,1050) ; v1(2660,1045) 2660.26,1044.74 U4.5@2767.94,1044.74
  Bottom Layer w10: v1(915,1985) 1335,1985 1375,2025 v1(1595,2025) ; v1(2150,1050) 2145,1045 v1(2660,1045)
NetU1_17: U1.17 U8.11 | length 2126
  Top Layer w10: U1.17@1535.2,2043.81 1535.39,2044 1616,2044 v1(1655,2005) ; U8.11@3060.02,1629.05 3109.97,1629.05 3167.96,1687.04 3167.96,1997.96 v1(3175,2005) 3165,2005 3165,2004.91
  Bottom Layer w10: v1(1655,2005) 3170,2005 3175,2000 v1(3175,2005)
NetU1_44: U1.44 U4.6 U400.15 | length 3551.8
  Top Layer w10: v1(620,1355) 629,1364 629,1959 655,1985 U400.15@830,1985 ; U400.15@828.03,1985.02 865.02,1985.02 v1(915,2035) ; v1(1200,2045) U1.44@1265,2045 ; v1(2700,1095) 2700.26,1094.74 U4.6@2767.94,1094.74
  Bottom Layer w10: v1(620,1355) 620,1330 760,1190 865.2,1190 865.33,1190.13 1734.87,1190.13 1810,1115 2660,1115 2680,1095 v1(2700,1095) ; v1(915,2035) 1190,2035 v1(1200,2045)
NetU1_45: U1.45 U8.12 | length 2415.2
  Top Layer w10: v1(1230,2025) 1225,2025 1225.87,2024.13 U1.45@1263.54,2024.13 ; U8.12@3042.32,1666.34 3112.26,1666.34 3135,1689.08 v1(3135,2045)
  Bottom Layer w10: v1(1230,2025) 1350,2025 1369,2044 2439,2044 2440,2045 v1(3135,2045)
SWCLK: J1.2 U1.41 | length 1587.2
  Top Layer w10: v1(625,2530) 625,2160 v1(645,2140) ; v1(1190,2140) 1227.13,2102.87 U1.41@1263.54,2102.87
  Bottom Layer w10: J1.2@70,2530 v1(625,2530) ; v1(645,2140) v1(1190,2140)
pads on no net: BZ1.0 J6.1 J6.2 J6.3 J6.4 J6.5 J6.6 J6.7 J6.8 J6.A2 J6.A3 J6.A5 J6.A8 J6.A10 J6.A11 J6.B2 J6.B3 J6.B5 J6.B8 J6.B10 J6.B11 J7.0 J8.0 J200.0 J201.0 J300.0 J301.0 P1.0 P2.0 P3.0 P4.0 Q1.3 Q1.4 Q1.5 SW1.3 SW1.4 U1.3 U1.46 U1.49 U4.7 U4.8 U5.5 U8.4 U8.5 U8.7 U8.13 U100.7 U100.8
copper on no net: | length 1
  Signal Layer 1 w10: -719.95,1906.13 -718.95,1906.13
  other v2: 1983.39,2895.53 2683.39,2895.53 1983.39,3195.53 2683.39,3195.53

## Polygon pours and split planes (outlines as drawn)
GND_1 on Signal Layer 2 "Gnd_1" (solid, pour order 0): 25,25 25,3250 3250,3250 3250,25
+3.3Vdc on Signal Layer 1 "+3.3Vdc" (solid, pour order 2): 50,50 50,3225 3250,3225 3250,50

## Other copper
Top Layer:
  text "Top Layer" at -650,-325 h60
Signal Layer 1:
  text "Mid 1 Power Layer" at -625,-325 h60
Signal Layer 2:
  text "Mid 2 Ground Layer" at -650,-325 h60
Bottom Layer:
  text "Bottom Layer" at -650,-325 h60

## Silkscreen, mask and mechanical layers (free items; w line width, h text height)
Top Overlay:
  text "Otto Box" at 202.31,191.11 h60
  text "PN-XXXXXX REV E1" at 204.32,81.48 h60
  text "Top Silk" at -650,-325 h60
Bottom Overlay:
  text "Bottom Silk" at -650,-325 h60
Top Paste:
  text "Top Paste" at -650,-325 h60
Bottom Paste:
  text "Bottom Paste" at -675,-325 h60
Top Solder:
  text "Top Soldermask" at -650,-325 h60
Bottom Solder:
  text "Bottom Soldermask" at -650,-325 h60
Drill Guide:
  text "Drill Guide" at -660,-325 h60
Mechanical 1:
  lines w10: -0.39,3149.61 0,3149.21 ; 3287,598 3287,993 ; 3287.4,597.23 3287.4,0 0,0 0,3267.72 3287.4,3267.72 3287.4,994.92
Drill Drawing:
  text "Drill Drawing" at -655,-320 h60

## Text inside footprints (layer, text, board x,y; h text height)
D4: Top Overlay "K" at 506.39,3035.36 h11.81 r270
J7: Top Overlay "Pin1" at 2725.11,230.06 h19.68 r180
J8: Mechanical 16 "Pin1" at 3028.32,231.75 h19.68 r180
J200: Mechanical 16 "Pin1" at 225.31,1579.93 h19.68 r90
J201: Mechanical 16 "Pin1" at 226.54,1786.82 h19.68 r90
J300: Top Overlay "Pin1" at 225.82,1997.54 h19.68 r90
J301: Mechanical 16 "Pin1" at 225.69,2212.06 h19.68 r90
P1: Mechanical 16 "Pin1" at 3057.7,2576.93 h20 r270
P2: Top Overlay "Pin1" at 2137.8,231.99 h19.68 r180
P3: Top Overlay "Pin1" at 1403.8,250.99 h19.68 r180
P4: Top Overlay "Pin1" at 1656.8,251.99 h19.68 r180
U3: Top Overlay "Pin 1" at 1800.2,388.78 h7.87 r90
U8: Top Overlay "Pin 1" at 2872.09,1634.49 h11.81
U9: Top Overlay "Pin 1" at 488.13,2311.52 h15.75
U10: Top Overlay "Pin 1" at 761.88,1202.8 h11.81 r270
U100: Bottom Overlay "Pin 1" at 1888.85,3185.54 h20
X1: Top Overlay "Pin 1" at 1624.05,2315.43 h15.75
X2: Top Overlay "Pin 1" at 930.16,1614.64 h15.75